# EAGLE board 2PIC28schematic (EAGLE 5.12)
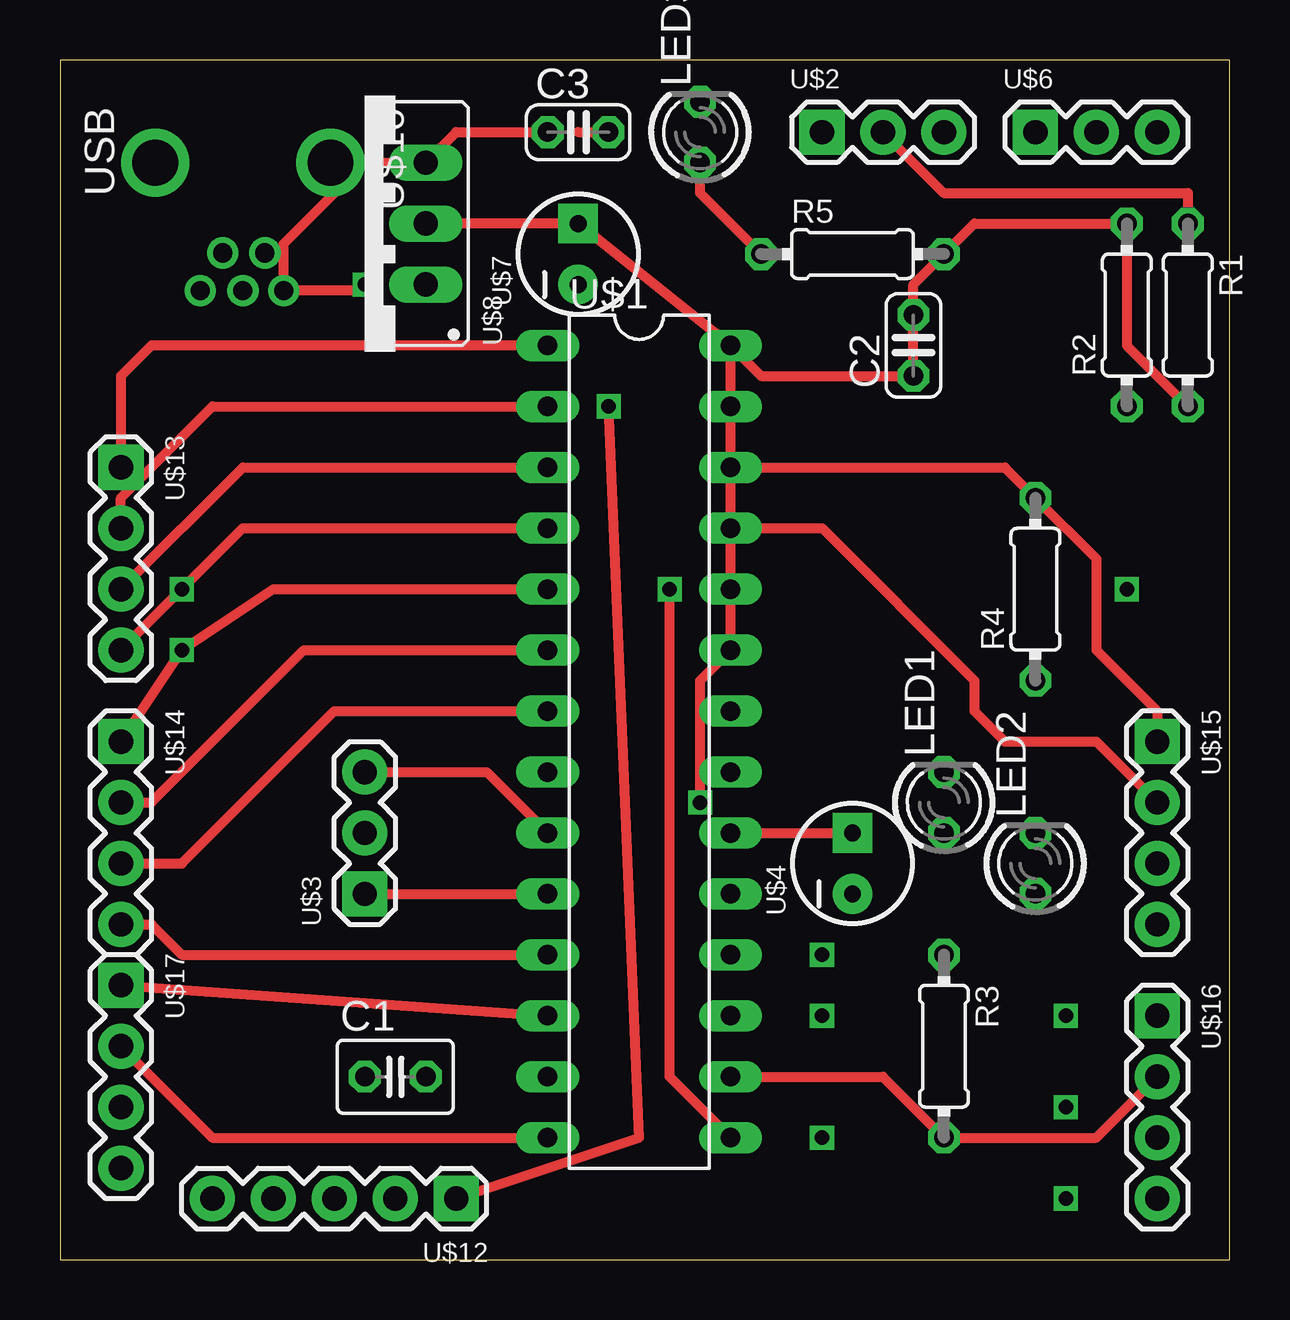
[diagram p0: board, top side]
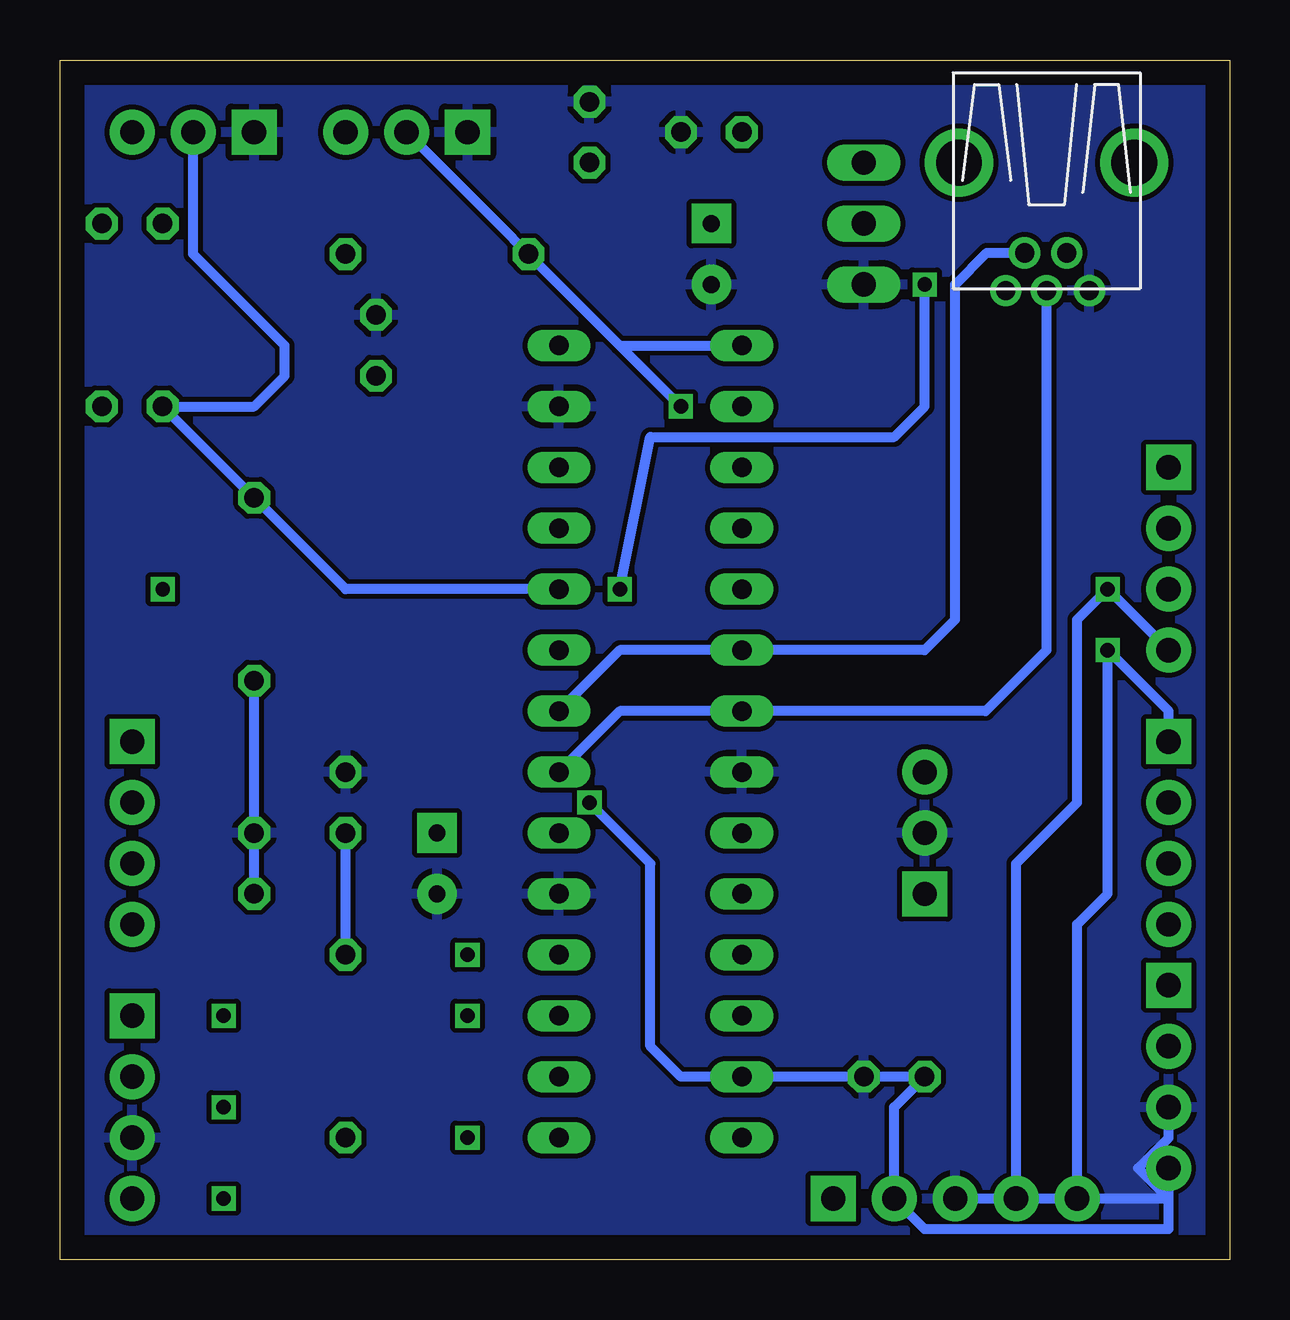
[diagram p1: board, bottom side, seen from below]

Size 48.73 x 50 mm. Coordinates in mm from the lower left corner, seen from the top.
Outline: 0,0 48.73,0 48.73,50 0,50 0,0
Copper layers (1*16): Top 0.035mm / dielectric 1.5mm / Bottom 0.035mm
Design rules "default": minimum track width 10mil, minimum drill 24mil, track to track 8mil, track to pad 8mil, pad to pad 8mil, via to via 8mil, smd to smd 8mil, copper to edge 40mil, drill to drill 8mil, minimum pad ring 10mil, minimum via ring 8mil, stop-mask expansion 4mil, vias tented up to drill 0mil, thermal gap 10mil

## Footprints (pad centres in the part's own frame; a part is rotated, then mirrored left to right if it is on the bottom)
C025-030X050 = drill 0.813 octagon: 1 -1.27,0; 2 1.27,0
C025-024X044 = drill 0.813 octagon: 1 -1.27,0; 2 1.27,0
LED3MM = drill 0.813 octagon: A -1.27,0; K 1.27,0
0204/7 = drill 0.813 octagon: 1 -3.81,0; 2 3.81,0
DIL28-3 = drill 0.813 long: 1 -16.51,-3.81; 2 -13.97,-3.81; 3 -11.43,-3.81; 4 -8.89,-3.81; 5 -6.35,-3.81; 6 -3.81,-3.81; 7 -1.27,-3.81; 8 1.27,-3.81; 9 3.81,-3.81; 10 6.35,-3.81; 11 8.89,-3.81; 12 11.43,-3.81; 13 13.97,-3.81; 14 16.51,-3.81; 15 16.51,3.81; 16 13.97,3.81; 17 11.43,3.81; 18 8.89,3.81; 19 6.35,3.81; 20 3.81,3.81; 21 1.27,3.81; 22 -1.27,3.81; 23 -3.81,3.81; 24 -6.35,3.81; 25 -8.89,3.81; 26 -11.43,3.81; 27 -13.97,3.81; 28 -16.51,3.81
1X03 = drill 1.016 pad 1.88 square: 1 0,0 | drill 1.016 pad 1.88 round: 2 2.54,0; 3 5.08,0
CAP_POL_D = drill 0.7 pad 1.651 square: 1 1.27,0 | drill 0.7 pad 1.651 round: 2 -1.27,0
TO220 = drill 1.016 long: 1 -2.54,0; 2 0,0; 3 2.54,0
USB-MINIB = drill 0.8 round: D+ 4.064,0; D- 2.489,0.914; GND 4.064,-1.778; ID 2.489,-0.838; VBUS 4.064,1.702 | drill 1.9 round: P$6 -1.27,-3.65; P$7 -1.27,3.65
1X05 = drill 1.016 pad 1.88 square: 1 0,0 | drill 1.016 pad 1.88 round: 2 2.54,0; 3 5.08,0; 4 7.62,0; 5 10.16,0
1X04 = drill 1.016 pad 1.88 square: 1 0,0 | drill 1.016 pad 1.88 round: 2 2.54,0; 3 5.08,0; 4 7.62,0

## Placement (x,y rotation side)
C1  [C025-030X050]  13.97,7.62 0 top
C2  [C025-024X044]  35.56,38.1 90 top
C3  [C025-024X044]  21.59,46.99 0 top
LED1  [LED3MM]  36.83,19.05 90 top
LED2  [LED3MM]  40.64,16.51 90 top
LED3  [LED3MM]  26.67,46.99 90 top
R1  [0204/7]  46.99,39.37 270 top
R2  [0204/7]  44.45,39.37 90 top
R3  [0204/7]  36.83,8.89 270 top
R4  [0204/7]  40.64,27.94 90 top
R5  [0204/7]  33.02,41.91 0 top
U$1  PIC28  [DIL28-3]  24.13,21.59 270 top
U$2  PUSHBUTTON2  [1X03]  31.75,46.99 0 top
U$3  8MHZ  [1X03]  12.7,15.24 90 top
U$4  CAP_POL  [CAP_POL_D]  33.02,16.51 90 top
U$6  PUSHBUTTON2  [1X03]  40.64,46.99 0 top
U$7  CAP_POL  [CAP_POL_D]  21.59,41.91 90 top
U$8  LD1117  [TO220]  15.24,43.18 90 top
U$10  USB  [USB-MINIB]  7.62,44.45 270 top
U$12  1X05_HEADER  [1X05]  16.51,2.54 180 top
U$13  1X04_HEADER  [1X04]  2.54,33.02 270 top
U$14  1X04_HEADER  [1X04]  2.54,21.59 270 top
U$15  1X04_HEADER  [1X04]  45.72,21.59 270 top
U$16  1X04_HEADER  [1X04]  45.72,10.16 270 top
U$17  1X04_HEADER  [1X04]  2.54,11.43 270 top

## Library data of the parts
C1-C3 LED1-LED3 R1-R5 U$1-U$4 U$6-U$8 U$10 U$12-U$17 = ME433

## Nets
3.3V: C1.1 C2.1 R1.2 R2.2 R5.2 U$1.13 U$1.23 U$1.28 U$7.1 U$8.2 U$17.4
5V: C3.1 U$1.15 U$8.3 U$10.VBUS
A0: U$1.2 U$13.2
A1: U$1.3 U$13.3
A4: U$1.12 U$17.1
B0: U$1.4 U$12.4 U$13.4
B1: U$1.5 U$12.5 U$14.1
B2: U$1.6 U$14.2
B3: U$1.7 U$14.3
B4: U$1.11 U$14.4
B5: U$1.14 U$17.2
B7: R3.2 U$1.16 U$16.2
B8: U$1.17
B9: U$1.18
B13: R2.1 U$1.24 U$6.2
B14: U$1.25 U$15.2
B15: R4.2 U$1.26 U$15.1
D+: U$1.21 U$10.D+
D-: U$1.22 U$10.D-
GND: C1.2 C2.2 C3.2 LED1.K LED2.K LED3.K U$1.8 U$1.19 U$1.27 U$2.1 U$3.2 U$4.2 U$6.1 U$7.2 U$8.1 U$10.GND U$12.3 U$16.3 U$17.3
MCLR: R1.1 U$1.1 U$2.2 U$12.1 U$13.1
N$3: U$1.9 U$3.3
N$5: U$1.10 U$3.1
N$19: U$1.20 U$4.1
N$25: LED1.A R3.1
N$28: LED2.A R4.1
N$30: LED3.A R5.1

## Tracks (layer width: path | path; a pad name or v marks a point on that pad's centre or on a via)
3.3V  (via drill 0.6)
  Top 0.406: U$8.2 U$7.1 U$1.28 | v26.67,19.05 26.67,24.13 U$1.23 U$1.28 | U$1.28 29.21,36.83 C2.1 35.56,40.64 R5.2 38.1,43.18 R2.2 44.45,38.1 R1.2
  Bottom 0.406: U$17.4 2.54,1.27 12.7,1.27 13.97,2.54 13.97,6.35 C1.1 U$1.13 22.86,7.62 24.13,8.89 24.13,16.51 v26.67,19.05
5V  (via drill 0.6)
  Top 0.406: C3.1 16.51,46.99 U$8.3 12.7,45.72 9.32,42.34 U$10.VBUS 12.45,40.39 v12.7,40.64 | v25.4,27.94 25.4,7.62 U$1.15
  Bottom 0.406: v12.7,40.64 12.7,35.56 13.97,34.29 24.13,34.29 v25.4,27.94
A0
  Top 0.406: U$13.2 2.54,31.75 6.35,35.56 U$1.2
A1
  Top 0.406: U$13.3 7.62,33.02 U$1.3
A4
  Top 0.406: U$17.1 U$1.12
B0  (via drill 0.6)
  Top 0.406: U$13.4 v5.08,27.94 7.62,30.48 U$1.4
  Bottom 0.406: U$13.4 v5.08,27.94 6.35,26.67 6.35,19.05 8.89,16.51 U$12.4
B1  (via drill 0.6)
  Top 0.406: U$14.1 v5.08,25.4 8.89,27.94 U$1.5
  Bottom 0.406: U$14.1 2.54,22.86 v5.08,25.4 5.08,15.24 6.35,13.97 U$12.5
B2
  Top 0.406: U$14.2 3.81,19.05 10.16,25.4 U$1.6
B3
  Top 0.406: U$14.3 5.08,16.51 11.43,22.86 U$1.7
B4
  Top 0.406: U$14.4 3.81,13.97 5.08,12.7 U$1.11
B5
  Top 0.406: U$17.2 6.35,5.08 U$1.14
B7
  Top 0.406: U$1.16 34.29,7.62 R3.2 43.18,5.08 U$16.2
B13
  Bottom 0.406: U$1.24 36.83,27.94 R2.1 40.64,35.56 39.37,36.83 39.37,38.1 43.18,41.91 U$6.2
B14
  Top 0.406: U$1.25 31.75,30.48 38.1,24.13 38.1,22.86 39.37,21.59 43.18,21.59 U$15.2
B15
  Top 0.406: U$1.26 39.37,33.02 R4.2 43.18,29.21 43.18,25.4 45.72,22.86 U$15.1
D+
  Bottom 0.406: U$10.D+ 7.62,25.4 10.16,22.86 25.4,22.86 U$1.21
D-
  Bottom 0.406: U$10.D- 10.11,41.96 11.43,40.64 11.43,26.67 12.7,25.4 25.4,25.4 U$1.22
GND
  Top 0.406: 21.59,46.99 C3.2
  Bottom 0.406: U$17.3 2.54,5.08 3.81,3.81 2.54,2.54 U$12.3
  pour Bottom (isolate 0.012): 48.26,49.53 0,49.53 0,0 49.53,0 49.53,21.59 48.26,21.59
MCLR  (via drill 0.6)
  Top 0.406: U$13.1 2.54,36.83 3.81,38.1 U$1.1 | U$12.1 24.13,5.08 v22.86,35.56 | U$2.2 36.83,44.45 46.99,44.45 R1.1
  Bottom 0.406: 25.4,38.1 U$1.1 | 25.4,38.1 U$2.2 | v22.86,35.56 25.4,38.1
N$1  (via drill 0.6)
  other vias: 12.7,40.64
N$2  (via drill 0.6)
  other vias: 44.45,27.94
N$3
  Top 0.406: U$3.3 17.78,20.32 U$1.9
N$4  (via drill 0.6)
  other vias: 22.86,35.56
N$5
  Top 0.406: U$3.1 U$1.10
N$6  (via drill 0.6)
  other vias: 31.75,5.08
N$7  (via drill 0.6)
  other vias: 41.91,2.54
N$8  (via drill 0.6)
  other vias: 41.91,10.16
N$9  (via drill 0.6)
  other vias: 41.91,6.35
N$10  (via drill 0.6)
  other vias: 31.75,10.16
N$11  (via drill 0.6)
  other vias: 31.75,12.7
N$19
  Top 0.406: U$1.20 U$4.1
N$25
  Bottom 0.406: R3.1 LED1.A
N$28
  Bottom 0.406: LED2.A R4.1
N$30
  Top 0.406: LED3.A 26.67,44.45 R5.1